# Altium PCB RPI.PcbDoc
Units mil, origin at the board's own origin, x right, y up, seen from the top; angles counter-clockwise.
Board outline 2558.74 x 2204.72 mil, 2 copper layers (Top Layer, Bottom Layer), stack 61.2 mil thick; 20 components, 32 nets, 98 pads, 1 vias.
Unrouted connection lines stored in the file: 8.
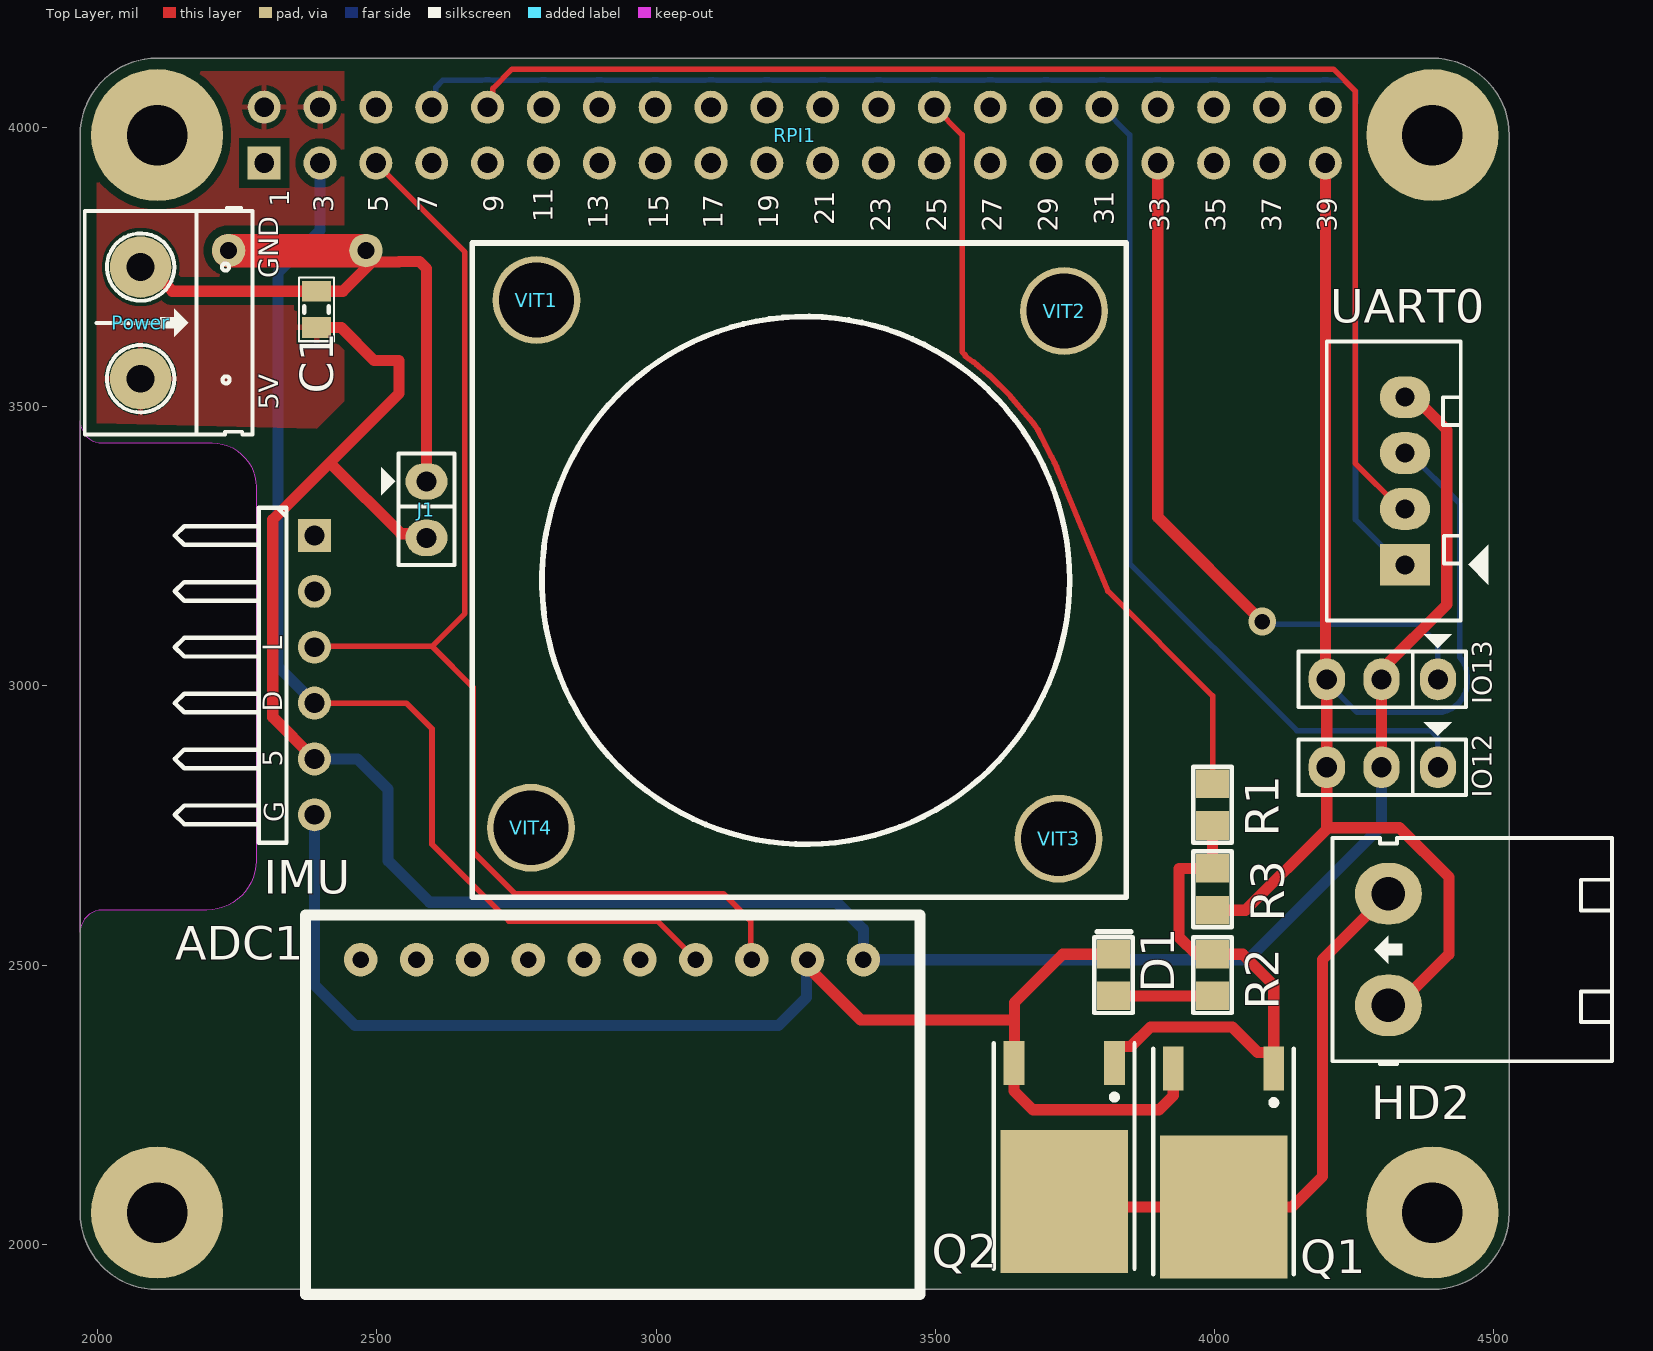
[diagram p0: Top Layer view]
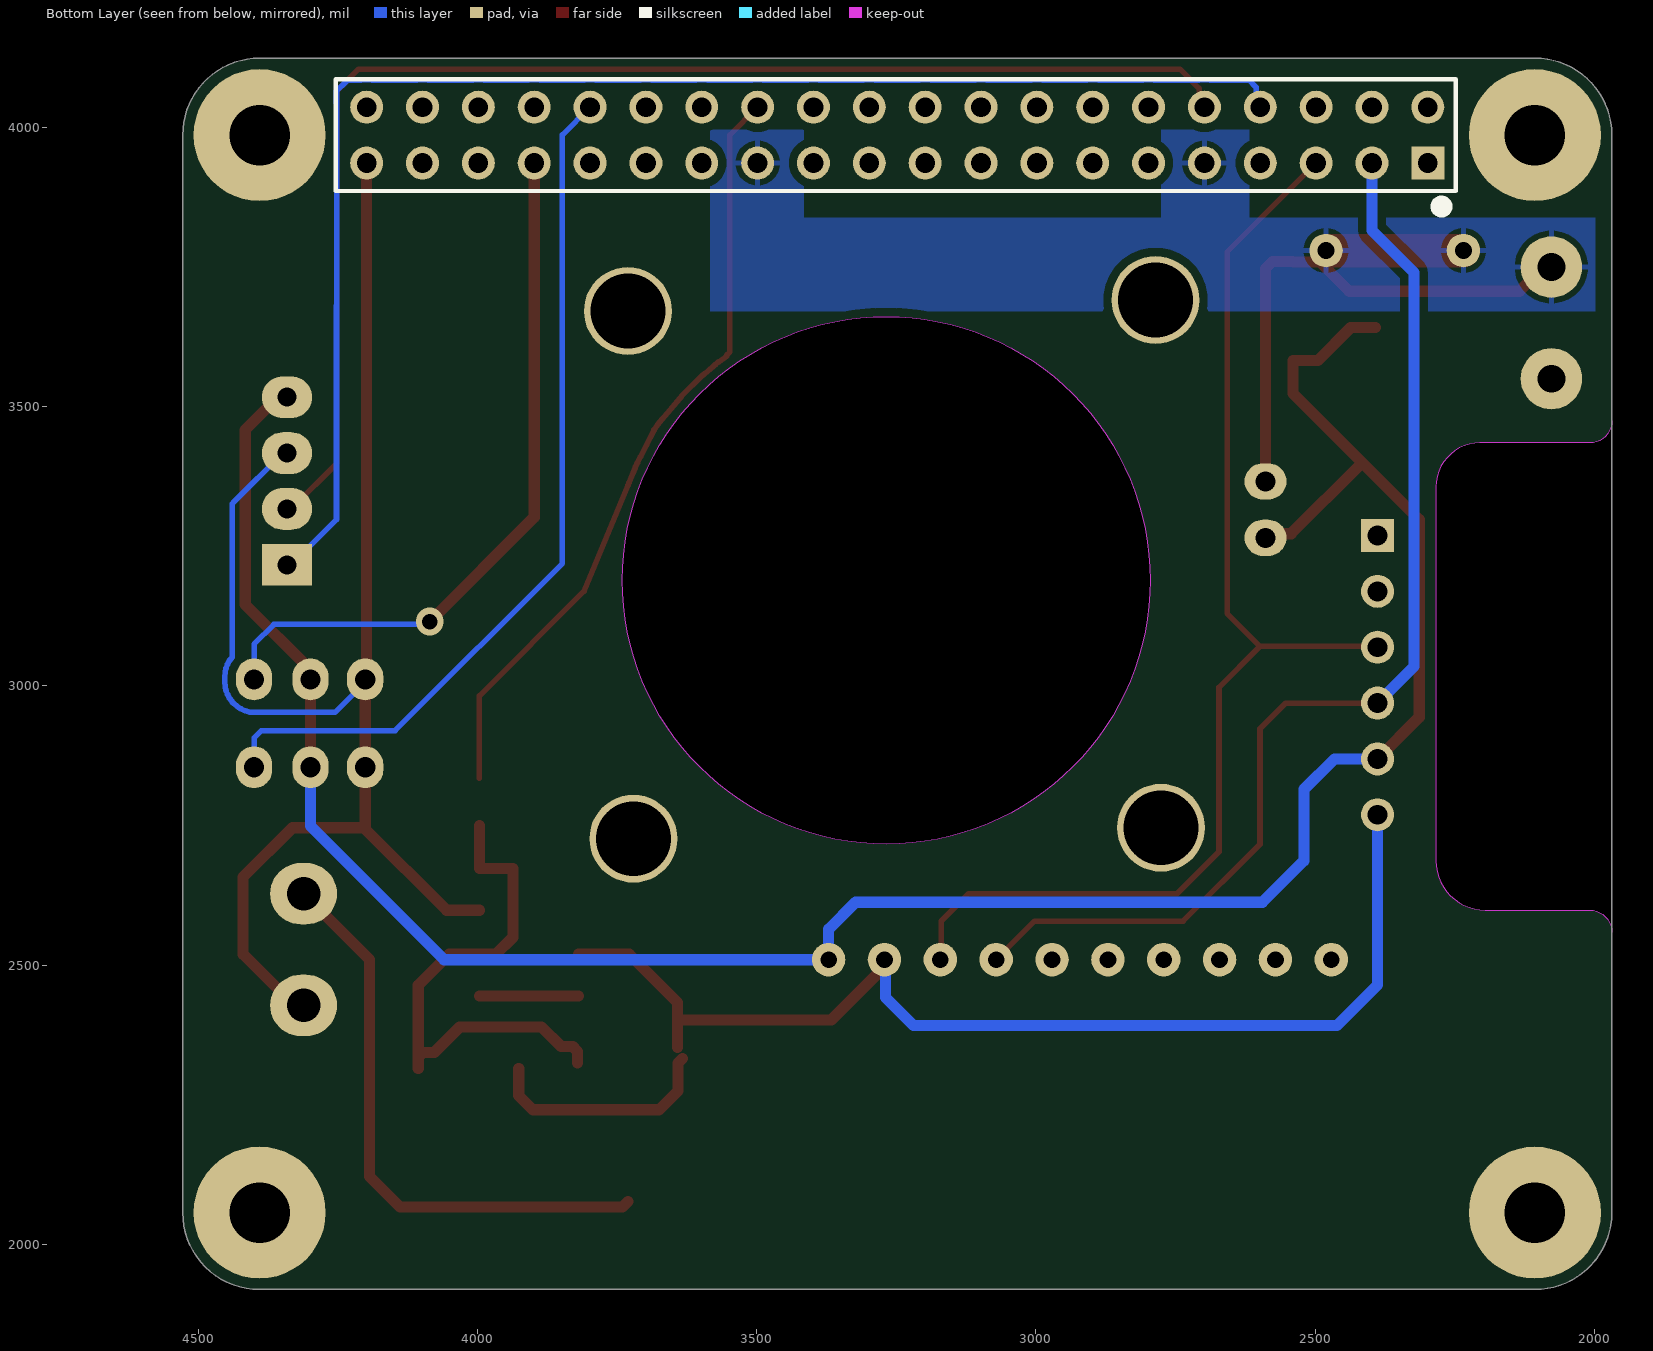
[diagram p1: Bottom Layer view, seen from below]

## Layer stack, top to bottom
Top Solder: solder mask 0.8, Solder Resist, Dk 3.5
Top Layer: signal copper 2.1
Dielectric 1: dielectric 57, FR-4, Dk 4.6
Bottom Layer: signal copper 2.1
Bottom Solder: solder mask 0.8, Solder Resist, Dk 3.5

## Board outline
2106.3,1919.29 cw(c2106.3,2057.09) 1968.5,2057.09 1968.5,3986.22 cw(c2106.3,3986.22) 2106.3,4124.02 4389.76,4124.02 cw(c4389.61,3986.38) 4527.24,3986.22 4527.24,2057.09 cw(c4389.61,2056.93) 4389.76,1919.29
cut-out: 1968.5,2559.06 1968.5,3474.41 ccw(c2007.87,3474.41) 2007.87,3435.04 2204.72,3435.04 cw(c2204.72,3356.3) 2283.46,3356.3 2283.46,2687.01 cw(c2194.89,2687) 2194.88,2598.43 2007.87,2598.43 ccw(c2007.87,2559.06)
cut-out: 2795.28,3188.98 ccw(c3267.72,3188.98) 3267.72,2716.54 ccw(c3267.72,3188.98) 3740.16,3188.98 ccw(c3267.72,3188.98) 3267.72,3661.42 ccw(c3267.72,3188.98)

## Design rules (kind name [scope] priority, off if disabled: settings)
Clearance [All] p1: gap=15 ignorepadtopadclearanceinfootprint=FALSE
PolygonConnect [All] p1: connectstyle=Relief reliefconductorwidth=10 reliefentries=4 polygonreliefangle="90 Angle" airgapwidth=10
RoutingVias [All] p1: holewidth=28 width=50 viastyle="Through Hole" minholewidth=28 minwidth=50 maxholewidth=28 maxwidth=50
SolderMaskExpansion [All] p1: expansion=4 istentingtop=FALSE
Width [All] p1: maxlimit=120 minlimit=10 preferedwidth=100
30 further rules are at their usual default settings.

## Components (designator, comment, footprint, x,y, rotation, side; value= is the part's Value field where it differs from the comment)
ADC1 "ADS1115 Module" ADS1115 2922.05,2261.81 r270 top
C1 "100nF" "C 0805" 2391.73,3641.73 r90 top
D1 "LED" L0805 3818.9,2519.68 r90 top
HD2 "Header 2" HED2T 4311.02,2427.95 r90 top
IMU "IMU9255" HDR1X6H 2388.03,3269.29 r270 top value="Connector 6"
IO12 "ESC 1" JP3 4299.61,2854.33 r180 top value=J3
IO13 "ESC 2" JP3 4299.61,3011.81 r180 top value=J3
J1 "Jumper 2" JP2 2588.58,3366.14 r270 top value="JP 2"
Power "Header 2" HED2 2076.77,3750 r270 top
Q1 "MOSFET N-CH" D-PACK 4105.71,2314.96 r180 top
Q2 "MOSFET N-CH" D-PACK 3820.28,2324.8 r180 top
R1 "1K" "RES 0805" 3996.06,2750 r0 top
R2 "1K" "RES 0805" 3996.06,2444.88 r0 top
R3 "1K" "RES 0805" 3996.06,2598.43 r0 top
RPI1 "RPI GPIO Connector" RPI 3248.03,3986.22 r180 top
UART0 "GPS" CON4 4340.55,3216.93 r90 top value="Connector 4"
VIT1 "VIT" VIT 2785.43,3690.94 r0 top
VIT2 "VIT" VIT 3730.31,3671.26 r0 top
VIT3 "VIT" VIT 3720.47,2726.38 r0 top
VIT4 "VIT" VIT 2775.59,2746.06 r0 top

## Footprints (in the part's own frame and the unit in brackets; to place one, negate y for a bottom-side part, rotate by r counter-clockwise, add the part's x,y. Pads: shape width x height; smd on the part's side, far side on the other; paste and mask are expansions set on the pad)
ADS1115 [mil] "ADS1115 Module Footprint"
  round 60 hole 30: 1(-248.03,448.82) 2(-248.03,348.82) 3(-248.03,248.82) 4(-248.03,148.82) 5(-248.03,48.82) 6(-248.03,-51.18) 7(-248.03,-151.18) 8(-248.03,-251.18) 9(-248.03,-351.18) 10(-248.03,-451.18)
  silkscreen extent -328,-550 352,550, body extent -328,-550 352,550, height 265
"C 0805" [mm] "CAP"
  rect 0.95x1.3 smd: 1(0,0) 2(1.65,0)
  silkscreen extent -0.62,-0.8 2.28,0.8, body extent -0.19,-0.63 1.84,0.63, height 0.65
CON4 [mil] "CON4"
  rect 75x90 hole 34: 1(0,0)
  oval 75x90 hole 34: 2(100,0) 3(200,0) 4(300,0)
  silkscreen extent -100,-150 400,140, body extent -90,-90 398,136, height 276
D-PACK [mm] "D-PACK"
  rect 0.95x2 smd: 1(0,0) 3(4.57,0)
  rect 5.8x6.5 smd: 2(2.285,6.3)
  silkscreen extent -0.92,-0.9 5.48,9.35, body extent -1.02,-0.45 5.56,9.25, height 2.3
HDR1X6H [mm] "Connector; Header; 6 Position; Right Angle"
  rect 1.5x1.5 hole 0.9: 1(0,0)
  round 1.5 hole 0.9: 2(2.54,0) 3(5.08,0) 4(7.62,0) 5(10.16,0) 6(12.7,0)
  silkscreen extent -1.27,-6.35 13.97,-1.27, body extent -1.27,-7 13.97,1.27, height 4.33
HED2 [mil] "Header 2, 2 pin, hight 300mil, Pin to Pin 200, Colour Green"
  round 110 hole 50: 1(0,0) 2(200,0)
  silkscreen extent -106,-100 300,200, body extent -92,-140 302,155, height 394
HED2T [mil] "Header 2, 2 pin, hight 300mil, Pin to Pin 200, Colour Green"
  oval 110x120 hole 60: 1(0,0) 2(200,0)
  silkscreen extent -105,-400 300,100, body extent -97,-399 297,73, height 334
JP2 [mil]
  oval 65x75 hole 36: 1(0,0) 2(101,0)
  silkscreen extent -50,-81 150,50, body extent -48,-50 148,48, height 323
JP3 [mil] "Jumper 3"
  oval 65x75 hole 36: 1(-100,0) 2(1,0) 3(99,0)
  silkscreen extent -150,-81 150,50, body extent -150,-60 150,55, height 355
L0805 [mm] "Body 2.0x1.3mm, IPC High Density"
  rect 1.3x1.5 smd: A(-1.9,0) K(0,0)
  silkscreen extent -2.68,-0.87 1.03,0.87, body extent -1.95,-0.63 0.05,0.62, height 0.68
"RES 0805" [mm] "RES 0805"
  rect 1.5x1.3 smd: 1(0,0) 2(0,1.9)
  silkscreen extent -0.87,-0.77 0.88,2.68, body extent -0.63,-0.07 0.64,1.97, height 0.6
RPI [mm]
  rect 1.5x1.5 hole 0.9: 1(24.13,1.27)
  round 1.5 hole 0.9: 2(24.13,-1.27) 3(21.59,1.27) 4(21.59,-1.27) 5(19.05,1.27) 6(19.05,-1.27) 7(16.51,1.27) 8(16.51,-1.27) 9(13.97,1.27) 10(13.97,-1.27) 11(11.43,1.27) 12(11.43,-1.27) 13(8.89,1.27) 14(8.89,-1.27) 15(6.35,1.27) 16(6.35,-1.27) 17(3.81,1.27) 18(3.81,-1.27) 19(1.27,1.27) 20(1.27,-1.27) 21(-1.27,1.27) 22(-1.27,-1.27) 23(-3.81,1.27) 24(-3.81,-1.27) 25(-6.35,1.27) 26(-6.35,-1.27) 27(-8.89,1.27) 28(-8.89,-1.27) 29(-11.43,1.27) 30(-11.43,-1.27) 31(-13.97,1.27) 32(-13.97,-1.27) 33(-16.51,1.27) 34(-16.51,-1.27) 35(-19.05,1.27) 36(-19.05,-1.27) 37(-21.59,1.27) 38(-21.59,-1.27) 39(-24.13,1.27) 40(-24.13,-1.27)
  body extent -25.52,-2.63 25.53,2.38, height 8.5
VIT [mm] "VIT"
  round 4 hole 3.4: VIT1(0,0)

## Part data
ADC1: library part "ADS1115 Module ADC"
C1: library part "CAP CERAIC", "Capacitor", Degigned by="Mehdi Meghdadi", Publisher=iDr., WEB SITE=www.idrdot.ir
HD2 Power: library part Hed2, "Header 2 (Green)"
IMU: library part "jam 6", "jam 6"
IO12 IO13: library part JP3, "Jumper 3"
J1: library part "JP 2"
Q1 Q2: "TRANSISTOR MOSFET N-CH"
R1 R2 R3: library part RES, "RESISTOR"
RPI1: library part "rpi connector", "GPIO Header for Raspberry Pi A+/B+/Pi 2/Pi 3 - 2x20", Manufacturer="SparkFun Electronics", Manufacturer Part Number=PRT-14017, Supplier Part Number 1=1568-1462-ND, Accessory Type=Connector, Category="Development Boards, Kits, Programmers", ComponentLink1Description=https://cdn.sparkfun.com/datasheets/Dev/RaspberryPi/12313.pdf, ComponentLink1URL=https://cdn.sparkfun.com/datasheets/Dev/RaspberryPi/12313.pdf, For Use With/Related Products="Raspberry Pi", Nils Minor=author, nilsminor@web.de=mail, Part Status=Active, Pricing 1="1=1.84 (EUR)", RoHS="RoHS Compliant", Stock 1=150, Supplier 1=Digi-Key
UART0: library part Con4, "Connector 4"
VIT1 VIT2 VIT3 VIT4: "Oc Vit"

## Free pads (board coordinates)
  round 60 hole 30: 2(2480.32,3779.53) 3(2234.25,3779.53)
  round 236.22 hole 108.27: ""(2106.3,2057.09) ""(2106.3,3986.22) ""(4389.76,2057.09) ""(4389.76,3986.22)

## Via types
v1: diameter 50, hole 28, Top Layer to Bottom Layer, 1 vias

## Nets (pads, with @x,y where several pads share a name; then routed paths per layer and width w, separated by ;. In a path a pad name is that pad's centre, name@x,y a point inside that pad or via, vN(x,y) a via of type N, cw(c..) or ccw(c..) an arc to the next point about the centre after c; other vN are vias at no path point)
+3V3: RPI1.1 RPI1.17
+5V: ADC1.1 C1.1 IMU.5 IO12.2 IO13.2 J1.2 Power.2 RPI1.2 RPI1.4 UART0.4 | length 4397.3
  Top Layer w10: Power.2@2057.09,3553.15 Power.2@2076.77,3553.15
  Top Layer w20: IMU.5 2313.46,2943.86 2313.46,3297.72 2411.42,3395.67 ; C1.1 2436,3641.73 2495.06,3582.68 2539.37,3582.68 2539.37,3523.62 2411.42,3395.67 ; J1.2 2581.18,3272.55 2542.6,3272.55 2419.47,3395.67 2411.42,3395.67 ; IO12.2 4298.61,2999.39 IO13.2@4301.18,3001.97 ; IO13.2@4298.61,3001.97 4298.61,3028.92 4415.55,3145.87 4415.55,3458.46 4357.09,3516.93 UART0.4
  Bottom Layer w10: Power.2@2076.77,3562.99 Power.2@2089.76,3562.99
  Bottom Layer w20: IMU.5 2465.35,2869.29 2519.68,2814.96 2519.68,2687.01 2593.99,2612.7 3322.34,2612.7 3370.87,2564.17 3370.87,2519.68 ADC1.1 4059.45,2509.84 4298.61,2749 IO12.2
GND: ADC1.2 C1.2 D1.K HD2.1 IMU.6 IO12.3 IO13.3 J1.1 pad.2 pad.3 Power.1 Q1.3 Q2.3 R3.1 RPI1.6 RPI1.9 RPI1.14 RPI1.20 RPI1.25 RPI1.30 RPI1.34 RPI1.39 UART0.3 | length 6379.2
  Top Layer w10: Power.1 Power.1@2090.18,3750
  Top Layer w20: Power.1@2090.18,3750 2133.49,3706.69 C1.2 2439,3706.69 2491.16,3758.86 2539.37,3758.86 ; 2539.37,3759.84 2575.88,3759.84 2588.58,3747.14 J1.1 ; ADC1.2@3277.56,2490.16 3366.14,2401.57 3641.73,2401.57 ; Q2.3@3632.48,2332.68 Q2.3 3640.36,2275 3674.36,2241 3900,2241 3925.79,2266.79 Q1.3 ; Q2.3@3641.73,2352.36 3641.73,2401.57 ; D1.K 3728,2519.69 3641.73,2433.42 3641.73,2401.57 ; R3.1 4055.12,2598.43 4200.61,2743.91 IO12.3 4200.61,2999.82 IO13.3@4202.76,3001.97 ; RPI1.39 4198.03,3014.39 IO13.3 ; 4200.61,2746.06 4330.71,2746.06 4419.29,2657.48 4419.29,2519.68 4327.56,2427.95 HD2.1 ; UART0.3@4330.03,3427.45 UART0.3
  Top Layer w60: pad.3 pad.2@2470.47,3779.53
  Bottom Layer w10: IO13.3@4205.45,3001.97 4254.66,2952.76 4407.06,2952.76 ccw(c4389.89,3019.71) 4436.58,2968.75 ccw(c4389.89,3019.71) 4438.98,2971.05 4438.98,2972.08 ccw(c4399.61,3006.81) 4452.11,3006.81 4452.11,3016.81 ccw(c4399.61,3016.81) 4438.98,3051.54 4438.98,3326.01 4436.05,3328.93 4348.05,3416.93 UART0.3
  Bottom Layer w20: IMU.6 2388.03,2464.33 2460.63,2391.73 3218.5,2391.73 3269.27,2442.5 3269.27,2498.44 ADC1.2@3267.72,2500 ; J1.1 J1.1@2597.19,3374.75 ; HD2.1@4294.49,2411.42 HD2.1
NetADC1_3: ADC1.3 IMU.3 RPI1.5 | length 2181.4
  Top Layer w10: IMU.3 2389.61,3070.87 2598.43,3070.87 2657.48,3129.92 2657.48,3776.77 RPI1.5 ; 2600,3069.29 2671.85,2997.44 2671.85,2703.09 2746.99,2627.95 3120.08,2627.95 3169.29,2578.74 3169.29,2511.42 ADC1.3
NetADC1_4: ADC1.4 IMU.4 RPI1.3 | length 2007.1
  Top Layer w10: IMU.4@2401.57,2972.44 2404.72,2969.29 2552.36,2969.29 2598.43,2923.23 2598.43,2716.54 2736.22,2578.74 3001.97,2578.74 ADC1.4
  Bottom Layer w20: IMU.4 2322.83,3034.49 2322.83,3740.16 2398.03,3815.35 RPI1.3
NetD1_A: D1.A R2.1 | length 177.2
  Top Layer w20: D1.A R2.1
NetHD2_2: HD2.2 Q1.2 Q2.2 | length 1044.4
  Top Layer w20: Q2.2 3740.16,2066.93 Q1.2 4137.93,2066.93 4192.91,2121.91 4192.91,2509.84 HD2.2
NetIO12_1: IO12.1 RPI1.32 | length 1561.5
  Bottom Layer w10: RPI1.32 3847.56,3986.69 3847.56,3219.37 4146.98,2919.95 4386.49,2919.95 4399.61,2906.83 IO12.1@4399.61,2864.17
NetIO13_1: IO13.1 RPI1.33 | length 1291.3
  Top Layer w20: RPI1.33 3898.03,3301.97 v1(4085,3115)
  Bottom Layer w10: v1@4084.65,3110.24 4364.22,3110.24 4399.61,3074.85 IO13.1
NetQ1_1: Q1.1 Q2.1 R1.1 R2.2 R3.2 | length 961.2
  Top Layer w20: Q2.1 3820.28,2345.47 3828.98,2354.17 3849.65,2354.17 3884.77,2389.29 4031.38,2389.29 4077.01,2343.66 4097.01,2343.66 Q1.1@4105.71,2334.96 ; R1.1 R3.2 3936,2673.23 3936,2550 3966.31,2519.69 R2.2 4050,2519.69 4105.71,2463.98 4105.71,2343.66 Q1.1@4105.71,2334.96 ; Q1.1 Q1.1@4105.71,2334.96
NetR1_2: R1.2 RPI1.26 | length 1383.5
  Top Layer w10: RPI1.26 3547.56,3986.69 3547.56,3598.11 3553.15,3592.52 3553.15,3590.29 3566.93,3580.28 3567.81,3580.28 3572.82,3576 3573.46,3575.53 3574.01,3574.98 3574.31,3574.72 3577.12,3572.33 3593.23,3558.56 3596.04,3556.17 3596.94,3556.17 3634.91,3518.2 3634.91,3517.3 3637.3,3514.49 3659.02,3489.07 3673.82,3471.74 3674.33,3471.14 3676.47,3468.19 3681.59,3461.15 3683.48,3458.54 3683.48,3457.68 3684.57,3455.54 3696.62,3431.9 3697.7,3429.78 3707.66,3410.23 3712.75,3400.23 3713.12,3399.52 3713.32,3399.12 ; 3713.33,3399.11 3713.45,3398.87 3714.05,3398.25 3715.27,3395.3 3717.09,3391.72 3717.09,3390.9 3728.25,3363.95 3728.84,3363.37 3730.08,3359.55 3808.77,3169.58 3996.06,2982.28 R1.2@3996.06,2834.65
NetRPI1_7: RPI1.7
NetRPI1_8: RPI1.8 UART0.1 | length 2579.8
  Bottom Layer w10: RPI1.8 2605.34,4043.53 2605.34,4071.88 2618.11,4084.65 2687.64,4084.65 cw(c2698.03,4036.22) 2708.42,4084.65 2787.64,4084.65 cw(c2798.03,4036.22) 2808.42,4084.65 2887.64,4084.65 cw(c2898.03,4036.22) 2908.42,4084.65 2987.64,4084.65 cw(c2998.03,4036.22) 3008.42,4084.65 3087.64,4084.65 cw(c3098.03,4036.22) 3108.42,4084.65 3187.64,4084.65 cw(c3198.03,4036.22) 3208.42,4084.65 3287.64,4084.65 cw(c3298.03,4036.22) 3308.42,4084.65 3387.64,4084.65 cw(c3398.03,4036.22) 3408.42,4084.65 3487.64,4084.65 cw(c3498.03,4036.22) 3508.42,4084.65 3587.64,4084.65 cw(c3598.03,4036.22) 3608.42,4084.65 3687.64,4084.65 cw(c3698.03,4036.22) 3708.42,4084.65 3787.64,4084.65 cw(c3798.03,4036.22) 3808.42,4084.65 3887.64,4084.65 cw(c3898.03,4036.22) 3908.42,4084.65 3987.64,4084.65 cw(c3998.03,4036.22) 4008.42,4084.65 4087.64,4084.65 cw(c4098.03,4036.22) 4108.42,4084.65 4187.64,4084.65 cw(c4198.03,4036.22) 4208.42,4084.65 4232.28,4084.65 4235.21,4081.72 4251.97,4064.96 4251.97,4043.74 4251.65,4043.43 4251.65,3681.42 4251.97,3681.1 4251.97,3298.01 UART0.1@4330.71,3219.27
NetRPI1_10: RPI1.10 UART0.2 | length 2393.2
  Top Layer w10: RPI1.10 2707.42,4045.61 2707.42,4069.67 2742.08,4104.33 4212.6,4104.33 4251.65,4065.28 4251.65,3398.33 4330.71,3319.27 UART0.2@4330.71,3316.93
NetRPI1_11: RPI1.11
NetRPI1_12: RPI1.12
NetRPI1_13: RPI1.13
NetRPI1_15: RPI1.15
NetRPI1_16: RPI1.16
NetRPI1_18: RPI1.18
NetRPI1_19: RPI1.19
NetRPI1_21: RPI1.21
NetRPI1_22: RPI1.22
NetRPI1_23: RPI1.23
NetRPI1_24: RPI1.24
NetRPI1_29: RPI1.29
NetRPI1_31: RPI1.31
NetRPI1_35: RPI1.35
NetRPI1_36: RPI1.36
NetRPI1_37: RPI1.37
NetRPI1_38: RPI1.38
NetRPI1_40: RPI1.40
pads on no net: ADC1.5 ADC1.6 ADC1.7 ADC1.8 ADC1.9 ADC1.10 IMU.1 IMU.2 RPI1.27 RPI1.28 VIT1.VIT1 VIT2.VIT1 VIT3.VIT1 VIT4.VIT1

## Polygon pours and split planes (outlines as drawn)
GND on Bottom Layer "GND_L02_P002" (solid, pour order 2): 2618.11,3996.06 2775.59,3996.06 2775.59,3818.9 2618.11,3818.9
GND on Bottom Layer "GND_L02_P001" (solid, pour order 1): 1998.03,3838.58 2017.72,3838.58 3415.35,3838.58 3415.35,3996.06 3582.68,3996.06 3582.68,3671.26 1998.03,3671.26
+5V on Top Layer "+5V_L01_P000" (solid, remove dead copper, pour order 0): 1998.03,3470.37 1998.03,4051.08 2047.24,4100.29 2440.94,4100.29 2440.94,3509.74 2391.73,3460.53

## Silkscreen, mask and mechanical layers (free items; w line width, h text height)
Top Overlay:
  circle w10: c3267.72,3188.98 r472.44
  lines w10: 2670.62,2621.92 3841.73,2621.92 3841.73,3793.03 2670.62,3793.03 2670.62,2621.92
  text "1" at 2342.52,3858.27 h35 r90
  text "3" at 2421.26,3848.43 h35 r90
  text "5" at 2519.68,3848.43 h35 r90
  text "7" at 2608.27,3848.43 h35 r90
  text "9" at 2726.38,3848.43 h35 r90
  text "11" at 2814.96,3830.56 h35 r90
  text "21" at 3318.9,3824.73 h35 r90
  text "31" at 3818.9,3824.73 h35 r90
  text "13" at 2913.39,3818.9 h35 r90
  text "15" at 3021.65,3818.9 h35 r90
  text "17" at 3118.9,3818.9 h35 r90
  text "19" at 3218.9,3818.9 h35 r90
  text "23" at 3418.9,3813.07 h35 r90
  text "25" at 3518.9,3813.07 h35 r90
  text "27" at 3618.9,3813.07 h35 r90
  text "29" at 3718.9,3813.07 h35 r90
  text "33" at 3918.9,3813.07 h35 r90
  text "35" at 4018.9,3813.07 h35 r90
  text "37" at 4118.9,3813.07 h35 r90
  text "39" at 4218.9,3813.07 h35 r90
  text "GND" at 2322.83,3730.32 h35 r90
  text "5V" at 2322.83,3494.09 h35 r90
  text "L" at 2330.21,3062.05 h35 r90
  text "D" at 2330.21,2953.78 h35 r90
  text "5" at 2330.21,2855.35 h35 r90
  text "G" at 2332.68,2755.91 h35 r90
Bottom Overlay:
  circle w19.68: c2273.62,3858.27 r9.84
M2: Outline:
  the board outline again, w10